# Altium PCB PCB1.PcbDoc (part 2 of 2)
Units mm, origin at the board's own origin, x right, y up, seen from the top; angles counter-clockwise.
Board outline 42.41 x 25.14 mm, 2 copper layers (Top Layer, Bottom Layer); 357 components, 11 nets, 765 pads, 0 vias.
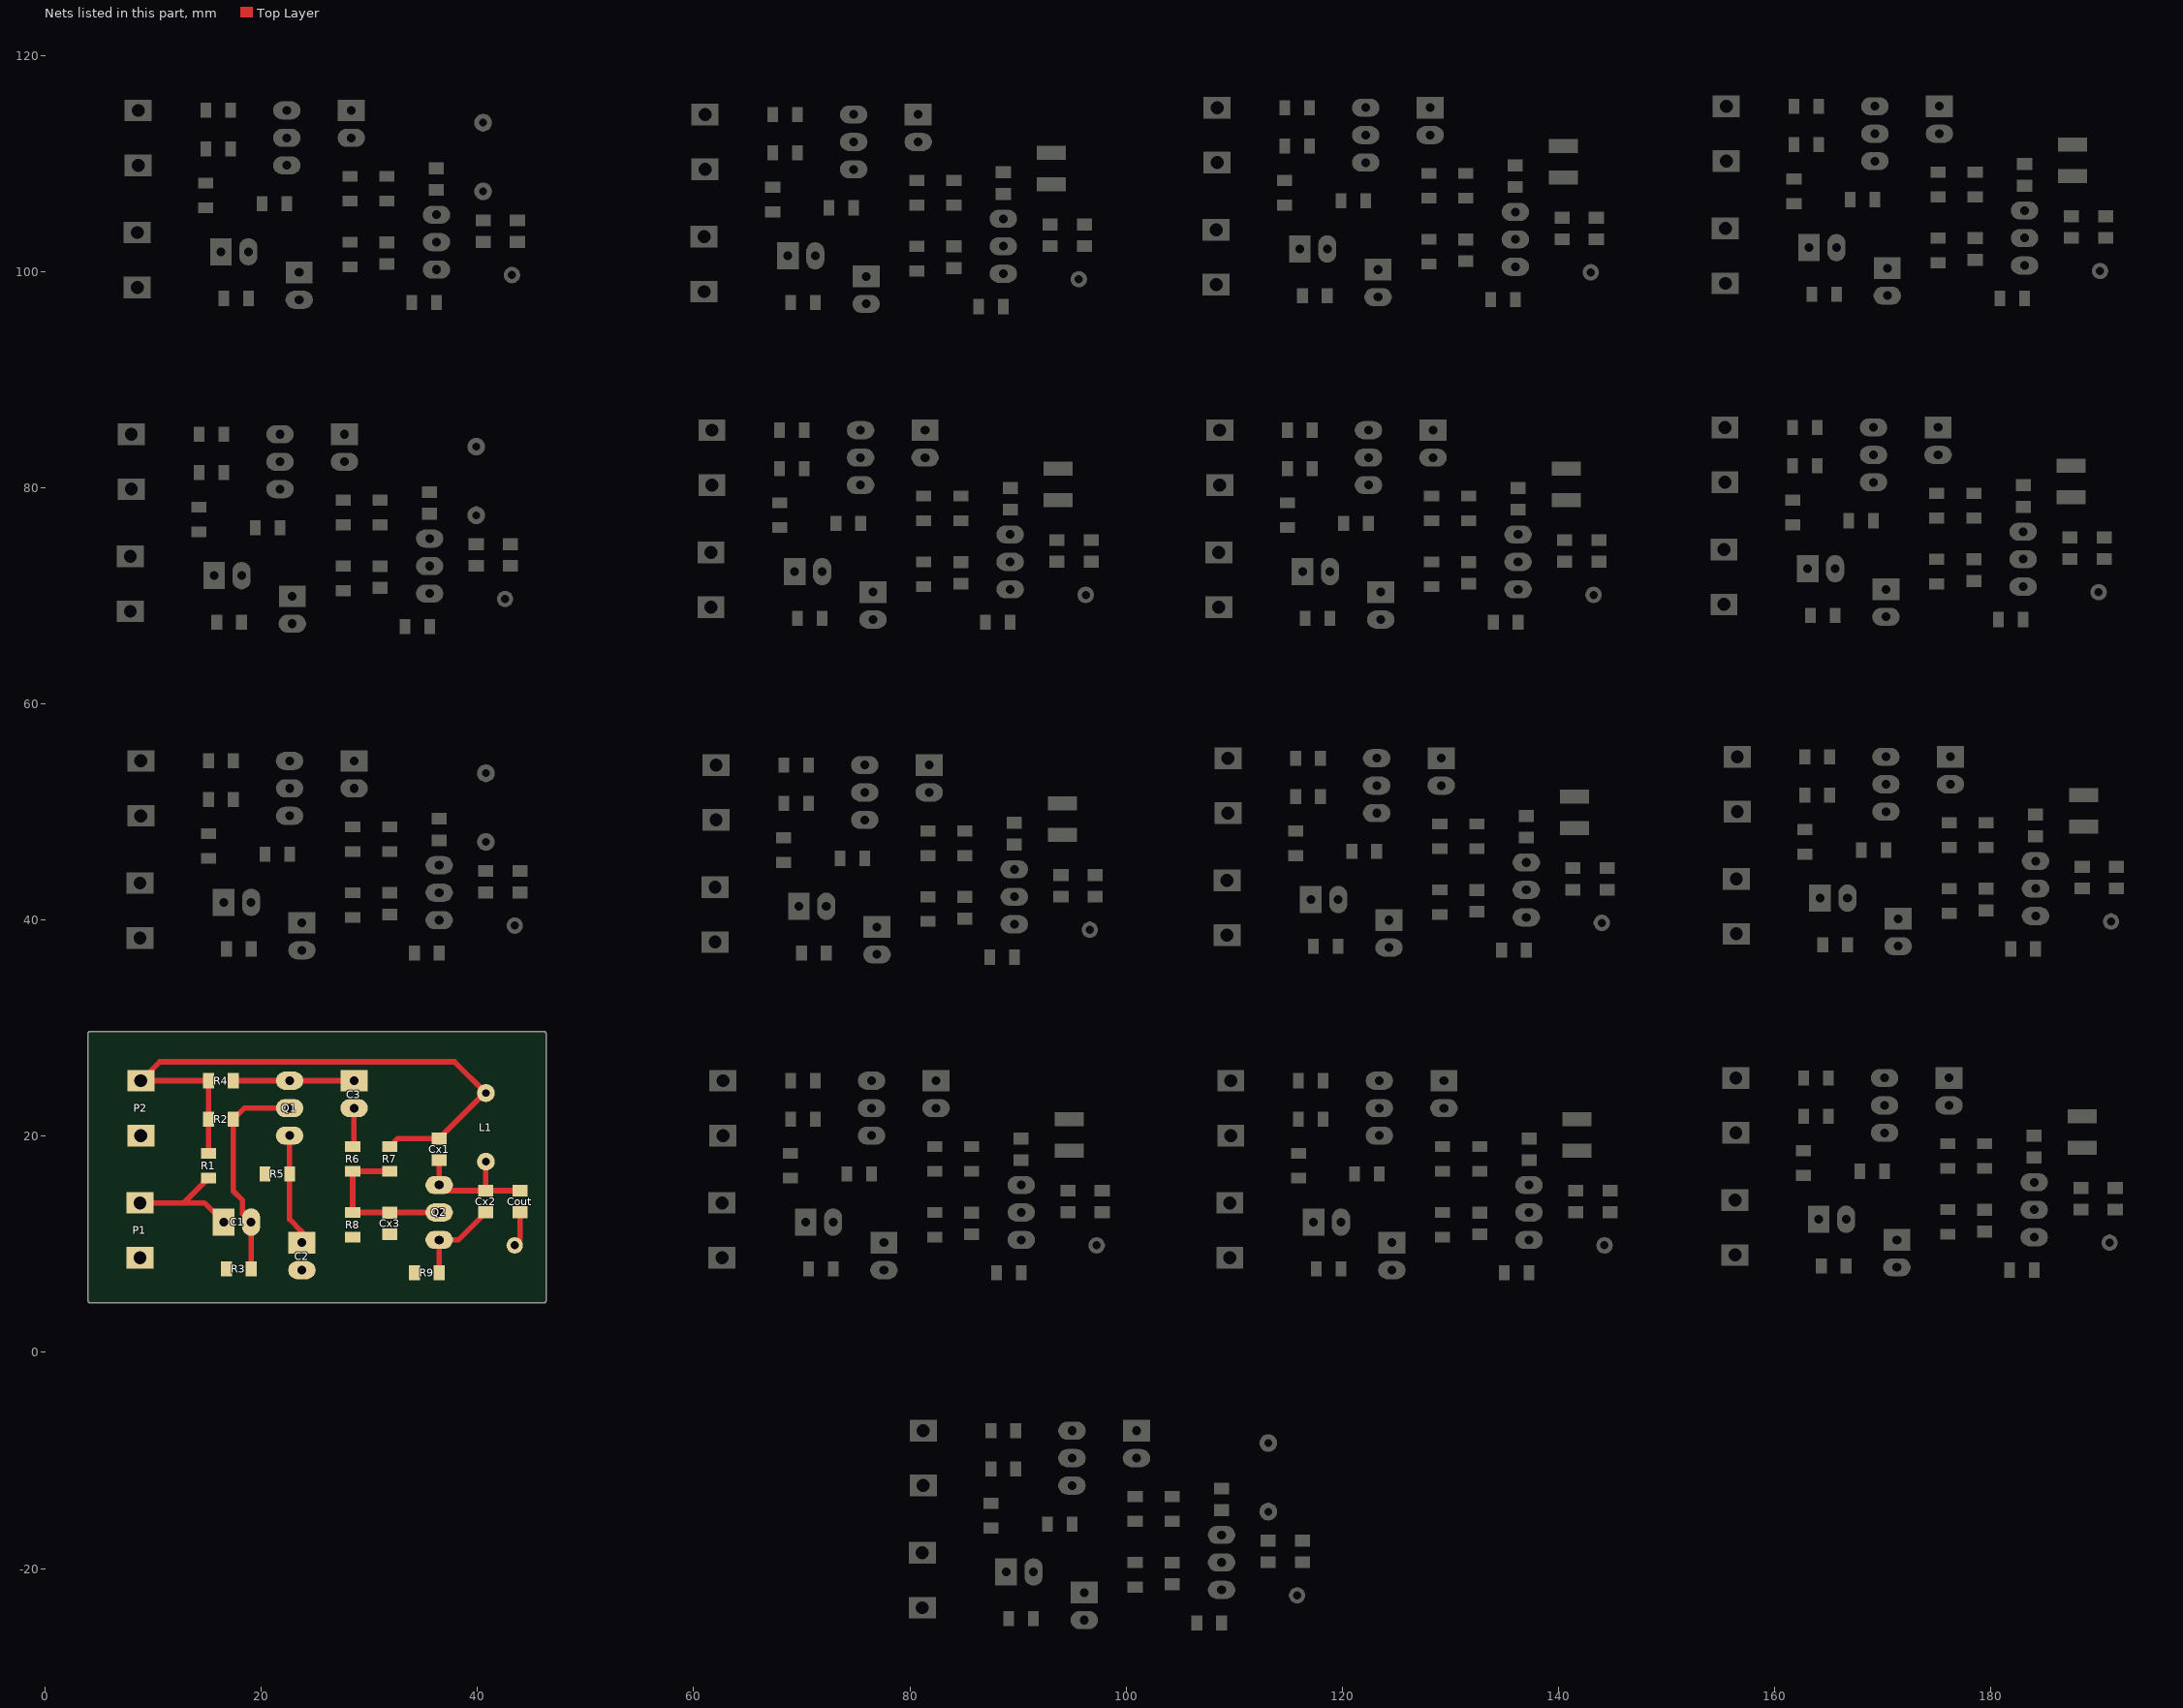
[diagram p2: the nets of this part, all layers, seen from the top]

## Part data
C1 C1_1 C1_1_1 C1_1_2 C1_2 C1_2_1 C1_2_2 C1_3 C1_3_1 C1_3_2 C1_4 C1_5 C1_5_1 C1_6 C1_6_1 C1_7 C1_7_1 C2 C2_1 C2_1_1 C2_1_2 C2_2 C2_2_1 C2_2_2 C2_3 C2_3_1 C2_3_2 C2_4 C2_5 C2_5_1 C2_6 C2_6_1 C2_7 C2_7_1 C3 C3_1 C3_1_1 C3_1_2 C3_2 C3_2_1 C3_2_2 C3_3 C3_3_1 C3_3_2 C3_4 C3_5 C3_5_1 C3_6 C3_6_1 C3_7 C3_7_1: library part CN-ALU-DIP, "Capacitor (Semiconductor SIM Model)"
Cout Cout_1 Cout_1_1 Cout_1_2 Cout_2 Cout_2_1 Cout_2_2 Cout_3 Cout_3_1 Cout_3_2 Cout_4 Cout_5 Cout_5_1 Cout_6 Cout_6_1 Cout_7 Cout_7_1 Cx1 Cx1_1 Cx1_1_1 Cx1_1_2 Cx1_2 Cx1_2_1 Cx1_2_2 Cx1_3 Cx1_3_1 Cx1_3_2 Cx1_4 Cx1_5 Cx1_5_1 Cx1_6 Cx1_6_1 Cx1_7 Cx1_7_1 Cx2 Cx2_1 Cx2_1_1 Cx2_1_2 Cx2_2 Cx2_2_1 Cx2_2_2 Cx2_3 Cx2_3_1 Cx2_3_2 Cx2_4 Cx2_5 Cx2_5_1 Cx2_6 Cx2_6_1 Cx2_7 Cx2_7_1 Cx3 Cx3_1 Cx3_1_1 Cx3_1_2 Cx3_2 Cx3_2_1 Cx3_2_2 Cx3_3 Cx3_3_1 Cx3_3_2 Cx3_4 Cx3_5 Cx3_5_1 Cx3_6 Cx3_6_1 Cx3_7 Cx3_7_1: library part CN
L1 L1_1 L1_2 L1_3 L1_4: library part L-DIP-1, "Inductor"
L_1 L_1_1 L_2 L_2_1 L_3 L_3_1 L_5 L_5_1 L_6 L_6_1 L_7 L_7_1 R1 R1_1 R1_1_1 R1_1_2 R1_2 R1_2_1 R1_2_2 R1_3 R1_3_1 R1_3_2 R1_4 R1_5 R1_5_1 R1_6 R1_6_1 R1_7 R1_7_1 R2 R2_1 R2_1_1 R2_1_2 R2_2 R2_2_1 R2_2_2 R2_3 R2_3_1 R2_3_2 R2_4 R2_5 R2_5_1 R2_6 R2_6_1 R2_7 R2_7_1 R3 R3_1 R3_1_1 R3_1_2 R3_2 R3_2_1 R3_2_2 R3_3 R3_3_1 R3_3_2 R3_4 R3_5 R3_5_1 R3_6 R3_6_1 R3_7 R3_7_1 R4 R4_1 R4_1_1 R4_1_2 R4_2 R4_2_1 R4_2_2 R4_3 R4_3_1 R4_3_2 R4_4 R4_5 R4_5_1 R4_6 R4_6_1 R4_7 R4_7_1 R5 R5_1 R5_1_1 R5_1_2 R5_2 R5_2_1 R5_2_2 R5_3 R5_3_1 R5_3_2 R5_4 R5_5 R5_5_1 R5_6 R5_6_1 R5_7 R5_7_1 R6 R6_1 R6_1_1 R6_1_2 R6_2 R6_2_1 R6_2_2 R6_3 R6_3_1 R6_3_2 R6_4 R6_5 R6_5_1 R6_6 R6_6_1 R6_7 R6_7_1 R7 R7_1 R7_1_1 R7_1_2 R7_2 R7_2_1 R7_2_2 R7_3 R7_3_1 R7_3_2 R7_4 R7_5 R7_5_1 R7_6 R7_6_1 R7_7 R7_7_1 R8 R8_1 R8_1_1 R8_1_2 R8_2 R8_2_1 R8_2_2 R8_3 R8_3_1 R8_3_2 R8_4 R8_5 R8_5_1 R8_6 R8_6_1 R8_7 R8_7_1 R9 R9_1 R9_1_1 R9_1_2 R9_2 R9_2_1 R9_2_2 R9_3 R9_3_1 R9_3_2 R9_4 R9_5 R9_5_1 R9_6 R9_6_1 R9_7 R9_7_1: library part Res-SMD, "Resistor"
P1 P1_1 P1_1_1 P1_1_2 P1_2 P1_2_1 P1_2_2 P1_3 P1_3_1 P1_3_2 P1_4 P1_5 P1_5_1 P1_6 P1_6_1 P1_7 P1_7_1 P2 P2_1 P2_1_1 P2_1_2 P2_2 P2_2_1 P2_2_2 P2_3 P2_3_1 P2_3_2 P2_4 P2_5 P2_5_1 P2_6 P2_6_1 P2_7 P2_7_1: "Domino, 2-Pin"
Q1 Q1_1 Q1_1_1 Q1_1_2 Q1_2 Q1_2_1 Q1_2_2 Q1_3 Q1_3_1 Q1_3_2 Q1_4 Q1_5 Q1_5_1 Q1_6 Q1_6_1 Q1_7 Q1_7_1 Q2 Q2_1 Q2_1_1 Q2_1_2 Q2_2 Q2_2_1 Q2_2_2 Q2_3 Q2_3_1 Q2_3_2 Q2_4 Q2_5 Q2_5_1 Q2_6 Q2_6_1 Q2_7 Q2_7_1: "NPN 600mW, ECB"

## Free pads (board coordinates)
  round 1.524 hole 0.762: 3(42.545,69.723) 3(43.18,99.695) 3(43.434,9.906) 3(43.434,39.497) 3(95.631,99.314) 3(96.266,70.104) 3(96.647,39.116) 3(97.282,9.906) 3(115.824,-22.479) 3(143.002,99.949) 3(143.256,70.104) 3(144.018,39.751) 3(144.272,9.906) 3(189.992,70.358) 3(190.119,100.076) 3(191.008,10.16) 3(191.135,39.878)

## Nets (pads, with @x,y where several pads share a name; then routed paths per layer and width w, separated by ;. In a path a pad name is that pad's centre, name@x,y a point inside that pad or via, vN(x,y) a via of type N, cw(c..) or ccw(c..) an arc to the next point about the centre after c; other vN are vias at no path point)
GND: C2.2 Cx3.1 P1.1 P2.1 R3.2 R5.2 R8.2 R9.2
NetC1_1: C1.1 P1.2 R1.2 | length 11.7
  Top Layer w0.5: P1.2@8.763,13.843 12.827,13.843 ; R1.2@15.113,16.129 12.827,13.843 ; C1.1@16.51,12.065 14.732,13.843 12.827,13.843
NetC1_2: C1.2 Q1.2 R2.2 R3.1 | length 20.2
  Top Layer w0.5: R3.1@19.05,7.747 C1.2@19.05,12.065 18.26,12.855 18.26,14.065 17.399,14.926 R2.2@17.399,21.59 18.415,22.606 Q1.2@22.606,22.606
NetC2_1: C2.1 Q1.1 R5.1 | length 10.4
  Top Layer w0.5: Q1.1@22.606,20.066 22.606,12.319 23.749,11.176 C2.1@23.749,10.16
NetC3_1: C3.1 Q1.3 R4.2 | length 11.2
  Top Layer w0.5: R4.2@17.399,25.146 Q1.3@22.606,25.146 C3.1@28.575,25.146
NetC3_2: C3.2 R6.1 | length 3.4
  Top Layer w0.5: R6.1@28.575,19.177 C3.2@28.575,22.606
NetCout_2: Cout.2 Cx1.1 Cx2.2 L1.2 Q2.3 | length 12.8
  Top Layer w0.5: Cx1.1@36.522,17.869 Cx1.1@36.449,17.796 Q2.3@36.449,15.494 36.973,14.97 Cx2.2@40.767,14.97 Cout.2@43.942,14.97 ; Cx2.2@40.767,14.97 L1.2@40.767,17.653
NetCx2_1: Cx2.1 Q2.1 R9.1 | length 8.4
  Top Layer w0.5: R9.1@36.449,7.366 Q2.1@36.449,10.414 38.211,10.414 Cx2.1@40.767,12.97
NetCx3_2: Cx3.2 Q2.2 R6.2 R7.2 R8.1 | length 15.2
  Top Layer w0.5: R7.2@31.877,16.764 R6.2@28.448,16.764 R8.1@28.448,12.954 Q2.2@36.449,12.954
OUT: Cout.1 pad.3@43.434,9.906 | length 3.3
  Top Layer w0.5: pad.3@43.434,9.906 43.942,10.414 Cout.1@43.942,12.97
VCC: Cx1.2 L1.1 P2.2 R1.1 R2.1 R4.1 R7.1 | length 57.7
  Top Layer w0.5: R1.1@15.113,18.415 R2.1@15.113,21.59 R4.1@15.113,25.146 P2.2@8.851,25.146 10.601,26.896 37.874,26.896 L1.1@40.767,24.003 ; R7.1@31.877,19.05 32.623,19.796 Cx1.2@36.449,19.796 L1.1@40.656,24.003
pads on no net: C1_1.1 C1_1.2 C1_1_1.1 C1_1_1.2 C1_1_2.1 C1_1_2.2 C1_2.1 C1_2.2 C1_2_1.1 C1_2_1.2 C1_2_2.1 C1_2_2.2 C1_3.1 C1_3.2 C1_3_1.1 C1_3_1.2 C1_3_2.1 C1_3_2.2 C1_4.1 C1_4.2 C1_5.1 C1_5.2 C1_5_1.1 C1_5_1.2 C1_6.1 C1_6.2 C1_6_1.1 C1_6_1.2 C1_7.1 C1_7.2 C1_7_1.1 C1_7_1.2 C2_1.1 C2_1.2 C2_1_1.1 C2_1_1.2 C2_1_2.1 C2_1_2.2 C2_2.1 C2_2.2 C2_2_1.1 C2_2_1.2 C2_2_2.1 C2_2_2.2 C2_3.1 C2_3.2 C2_3_1.1 C2_3_1.2 C2_3_2.1 C2_3_2.2 C2_4.1 C2_4.2 C2_5.1 C2_5.2 C2_5_1.1 C2_5_1.2 C2_6.1 C2_6.2 C2_6_1.1 C2_6_1.2 C2_7.1 C2_7.2 C2_7_1.1 C2_7_1.2 C3_1.1 C3_1.2 C3_1_1.1 C3_1_1.2 C3_1_2.1 C3_1_2.2 C3_2.1 C3_2.2 C3_2_1.1 C3_2_1.2 C3_2_2.1 C3_2_2.2 C3_3.1 C3_3.2 C3_3_1.1 C3_3_1.2 C3_3_2.1 C3_3_2.2 C3_4.1 C3_4.2 C3_5.1 C3_5.2 C3_5_1.1 C3_5_1.2 C3_6.1 C3_6.2 C3_6_1.1 C3_6_1.2 C3_7.1 C3_7.2 C3_7_1.1 C3_7_1.2 Cout_1.1 Cout_1.2 Cout_1_1.1 Cout_1_1.2 Cout_1_2.1 Cout_1_2.2 Cout_2.1 Cout_2.2 Cout_2_1.1 Cout_2_1.2 Cout_2_2.1 Cout_2_2.2 Cout_3.1 Cout_3.2 Cout_3_1.1 Cout_3_1.2 Cout_3_2.1 Cout_3_2.2 Cout_4.1 Cout_4.2 Cout_5.1 Cout_5.2 Cout_5_1.1 Cout_5_1.2 Cout_6.1 Cout_6.2 Cout_6_1.1 Cout_6_1.2 Cout_7.1 Cout_7.2 Cout_7_1.1 Cout_7_1.2 Cx1_1.1 Cx1_1.2 Cx1_1_1.1 Cx1_1_1.2 Cx1_1_2.1 Cx1_1_2.2 Cx1_2.1 Cx1_2.2 Cx1_2_1.1 Cx1_2_1.2 Cx1_2_2.1 Cx1_2_2.2 Cx1_3.1 Cx1_3.2 Cx1_3_1.1 Cx1_3_1.2 Cx1_3_2.1 Cx1_3_2.2 Cx1_4.1 Cx1_4.2 Cx1_5.1 Cx1_5.2 Cx1_5_1.1 Cx1_5_1.2 Cx1_6.1 Cx1_6.2 Cx1_6_1.1 Cx1_6_1.2 Cx1_7.1 Cx1_7.2 Cx1_7_1.1 Cx1_7_1.2 Cx2_1.1 Cx2_1.2 Cx2_1_1.1 Cx2_1_1.2 Cx2_1_2.1 Cx2_1_2.2 Cx2_2.1 Cx2_2.2 Cx2_2_1.1 Cx2_2_1.2 Cx2_2_2.1 Cx2_2_2.2 Cx2_3.1 Cx2_3.2 Cx2_3_1.1 Cx2_3_1.2 Cx2_3_2.1 Cx2_3_2.2 Cx2_4.1 Cx2_4.2 Cx2_5.1 Cx2_5.2 Cx2_5_1.1 Cx2_5_1.2 Cx2_6.1 Cx2_6.2 Cx2_6_1.1 Cx2_6_1.2 Cx2_7.1 Cx2_7.2 Cx2_7_1.1 Cx2_7_1.2 Cx3_1.1 Cx3_1.2 Cx3_1_1.1 Cx3_1_1.2 Cx3_1_2.1 Cx3_1_2.2 Cx3_2.1 Cx3_2.2 Cx3_2_1.1 Cx3_2_1.2 Cx3_2_2.1 Cx3_2_2.2 Cx3_3.1 Cx3_3.2 Cx3_3_1.1 Cx3_3_1.2 Cx3_3_2.1 Cx3_3_2.2 Cx3_4.1 Cx3_4.2 Cx3_5.1 Cx3_5.2 Cx3_5_1.1 Cx3_5_1.2 Cx3_6.1 Cx3_6.2 Cx3_6_1.1 Cx3_6_1.2 Cx3_7.1 Cx3_7.2 Cx3_7_1.1 Cx3_7_1.2 L1_1.1 L1_1.2 L1_2.1 L1_2.2 L1_3.1 L1_3.2 L1_4.1 L1_4.2 L_1.1 L_1.2 L_1_1.1 L_1_1.2 L_2.1 L_2.2 L_2_1.1 L_2_1.2 L_3.1 L_3.2 L_3_1.1 L_3_1.2 L_5.1 L_5.2 L_5_1.1 L_5_1.2 L_6.1 L_6.2 L_6_1.1 L_6_1.2 L_7.1 L_7.2 L_7_1.1 L_7_1.2 P1_1.1 P1_1.2 P1_1_1.1 P1_1_1.2 P1_1_2.1 P1_1_2.2 P1_2.1 P1_2.2 P1_2_1.1 P1_2_1.2 P1_2_2.1 P1_2_2.2 P1_3.1 P1_3.2 P1_3_1.1 P1_3_1.2 P1_3_2.1 P1_3_2.2 P1_4.1 P1_4.2 P1_5.1 P1_5.2 P1_5_1.1 P1_5_1.2 P1_6.1 P1_6.2 P1_6_1.1 P1_6_1.2 P1_7.1 P1_7.2 P1_7_1.1 P1_7_1.2 P2_1.1 P2_1.2 P2_1_1.1 P2_1_1.2 P2_1_2.1 P2_1_2.2 P2_2.1 P2_2.2 P2_2_1.1 P2_2_1.2 P2_2_2.1 P2_2_2.2 P2_3.1 P2_3.2 P2_3_1.1 P2_3_1.2 P2_3_2.1 P2_3_2.2 P2_4.1 P2_4.2 P2_5.1 P2_5.2 P2_5_1.1 P2_5_1.2 P2_6.1 P2_6.2 P2_6_1.1 P2_6_1.2 P2_7.1 P2_7.2 P2_7_1.1 P2_7_1.2 Q1_1.1 Q1_1.2 Q1_1.3 Q1_1_1.1 Q1_1_1.2 Q1_1_1.3 Q1_1_2.1 Q1_1_2.2 Q1_1_2.3 Q1_2.1 Q1_2.2 Q1_2.3 Q1_2_1.1 Q1_2_1.2 Q1_2_1.3 Q1_2_2.1 Q1_2_2.2 Q1_2_2.3 Q1_3.1 Q1_3.2 Q1_3.3 Q1_3_1.1 Q1_3_1.2 Q1_3_1.3 Q1_3_2.1 Q1_3_2.2 Q1_3_2.3 Q1_4.1 Q1_4.2 Q1_4.3 Q1_5.1 Q1_5.2 Q1_5.3 Q1_5_1.1 Q1_5_1.2 Q1_5_1.3 Q1_6.1 Q1_6.2 Q1_6.3 Q1_6_1.1 Q1_6_1.2 Q1_6_1.3 Q1_7.1 Q1_7.2 Q1_7.3 Q1_7_1.1 Q1_7_1.2 Q1_7_1.3 Q2_1.1 Q2_1.2 Q2_1.3 Q2_1_1.1 Q2_1_1.2 Q2_1_1.3 Q2_1_2.1 Q2_1_2.2 Q2_1_2.3 Q2_2.1 Q2_2.2 Q2_2.3 Q2_2_1.1 Q2_2_1.2 Q2_2_1.3 Q2_2_2.1 Q2_2_2.2 Q2_2_2.3 Q2_3.1 Q2_3.2 Q2_3.3 Q2_3_1.1 Q2_3_1.2 Q2_3_1.3 Q2_3_2.1 Q2_3_2.2 Q2_3_2.3 Q2_4.1 Q2_4.2 Q2_4.3 Q2_5.1 Q2_5.2 Q2_5.3 Q2_5_1.1 Q2_5_1.2 Q2_5_1.3 Q2_6.1 Q2_6.2 Q2_6.3 Q2_6_1.1 Q2_6_1.2 Q2_6_1.3 Q2_7.1 Q2_7.2 Q2_7.3 Q2_7_1.1 Q2_7_1.2 Q2_7_1.3 R1_1.1 R1_1.2 R1_1_1.1 R1_1_1.2 R1_1_2.1 R1_1_2.2 R1_2.1 R1_2.2 R1_2_1.1 R1_2_1.2 R1_2_2.1 R1_2_2.2 R1_3.1 R1_3.2 R1_3_1.1 R1_3_1.2 R1_3_2.1 R1_3_2.2 R1_4.1 R1_4.2 R1_5.1 R1_5.2 R1_5_1.1 R1_5_1.2 R1_6.1 R1_6.2 R1_6_1.1 R1_6_1.2 R1_7.1 R1_7.2 R1_7_1.1 R1_7_1.2 R2_1.1 R2_1.2 R2_1_1.1 R2_1_1.2 R2_1_2.1 R2_1_2.2 R2_2.1 R2_2.2 R2_2_1.1 R2_2_1.2 R2_2_2.1 R2_2_2.2 R2_3.1 R2_3.2 R2_3_1.1 R2_3_1.2 R2_3_2.1 R2_3_2.2 R2_4.1 R2_4.2 R2_5.1 R2_5.2 R2_5_1.1 R2_5_1.2 R2_6.1 R2_6.2 R2_6_1.1 R2_6_1.2 R2_7.1 R2_7.2 R2_7_1.1 R2_7_1.2 R3_1.1 R3_1.2 R3_1_1.1 R3_1_1.2 R3_1_2.1 R3_1_2.2 R3_2.1 R3_2.2 R3_2_1.1 R3_2_1.2 R3_2_2.1 R3_2_2.2 R3_3.1 R3_3.2 R3_3_1.1 R3_3_1.2 R3_3_2.1 R3_3_2.2 R3_4.1 R3_4.2 R3_5.1 R3_5.2 R3_5_1.1 R3_5_1.2 R3_6.1 R3_6.2 R3_6_1.1 R3_6_1.2 R3_7.1 R3_7.2 R3_7_1.1 R3_7_1.2 R4_1.1 R4_1.2 R4_1_1.1 R4_1_1.2 R4_1_2.1 R4_1_2.2 R4_2.1 R4_2.2 R4_2_1.1 R4_2_1.2 R4_2_2.1 R4_2_2.2 R4_3.1 R4_3.2 R4_3_1.1 R4_3_1.2 R4_3_2.1 R4_3_2.2 R4_4.1 R4_4.2 R4_5.1 R4_5.2 R4_5_1.1 R4_5_1.2 R4_6.1 R4_6.2 R4_6_1.1 R4_6_1.2 R4_7.1 R4_7.2 R4_7_1.1 R4_7_1.2 R5_1.1 R5_1.2 R5_1_1.1 R5_1_1.2 R5_1_2.1 R5_1_2.2 R5_2.1 R5_2.2 R5_2_1.1 R5_2_1.2 R5_2_2.1 R5_2_2.2 R5_3.1 R5_3.2 R5_3_1.1 R5_3_1.2 R5_3_2.1 R5_3_2.2 R5_4.1 R5_4.2 R5_5.1 R5_5.2 R5_5_1.1 R5_5_1.2 R5_6.1 R5_6.2 R5_6_1.1 R5_6_1.2 R5_7.1 R5_7.2 R5_7_1.1 R5_7_1.2 R6_1.1 R6_1.2 R6_1_1.1 R6_1_1.2 R6_1_2.1 R6_1_2.2 R6_2.1 R6_2.2 R6_2_1.1 R6_2_1.2 R6_2_2.1 R6_2_2.2 R6_3.1 R6_3.2 R6_3_1.1 R6_3_1.2 R6_3_2.1 R6_3_2.2 R6_4.1 R6_4.2 R6_5.1 R6_5.2 R6_5_1.1 R6_5_1.2 R6_6.1 R6_6.2 R6_6_1.1 R6_6_1.2 R6_7.1 R6_7.2 R6_7_1.1 R6_7_1.2 R7_1.1 R7_1.2 R7_1_1.1 R7_1_1.2 R7_1_2.1 R7_1_2.2 R7_2.1 R7_2.2 R7_2_1.1 R7_2_1.2 R7_2_2.1 R7_2_2.2 R7_3.1 R7_3.2 R7_3_1.1 R7_3_1.2 R7_3_2.1 R7_3_2.2 R7_4.1 R7_4.2 R7_5.1 R7_5.2 R7_5_1.1 R7_5_1.2 R7_6.1 R7_6.2 R7_6_1.1 R7_6_1.2 R7_7.1 R7_7.2 R7_7_1.1 R7_7_1.2 R8_1.1 R8_1.2 R8_1_1.1 R8_1_1.2 R8_1_2.1 R8_1_2.2 R8_2.1 R8_2.2 R8_2_1.1 R8_2_1.2 R8_2_2.1 R8_2_2.2 R8_3.1 R8_3.2 R8_3_1.1 R8_3_1.2 R8_3_2.1 R8_3_2.2 R8_4.1 R8_4.2 R8_5.1 R8_5.2 R8_5_1.1 R8_5_1.2 R8_6.1 R8_6.2 R8_6_1.1 R8_6_1.2 R8_7.1 R8_7.2 R8_7_1.1 R8_7_1.2 R9_1.1 R9_1.2 R9_1_1.1 R9_1_1.2 R9_1_2.1 R9_1_2.2 R9_2.1 R9_2.2 R9_2_1.1 R9_2_1.2 R9_2_2.1 R9_2_2.2 R9_3.1 R9_3.2 R9_3_1.1 R9_3_1.2 R9_3_2.1 R9_3_2.2 R9_4.1 R9_4.2 R9_5.1 R9_5.2 R9_5_1.1 R9_5_1.2 R9_6.1 R9_6.2 R9_6_1.1 R9_6_1.2 R9_7.1 R9_7.2 R9_7_1.1 R9_7_1.2
copper on no net: | length 4846.7
  Top Layer w0.5: 7.874,73.66 11.938,73.66 ; 8.509,103.632 12.573,103.632 ; 8.763,43.434 12.827,43.434 ; 14.224,75.946 11.938,73.66 ; 14.224,78.232 14.224,81.407 14.224,84.963 7.962,84.963 9.712,86.713 36.985,86.713 39.878,83.82 ; 14.859,105.918 12.573,103.632 ; 14.859,108.204 14.859,111.379 14.859,114.935 8.597,114.935 10.347,116.685 37.62,116.685 40.513,113.792 ; 15.113,45.72 12.827,43.434 ; 15.113,48.006 15.113,51.181 15.113,54.737 8.851,54.737 10.601,56.487 37.874,56.487 40.767,53.594 ; 15.621,71.882 13.843,73.66 11.938,73.66 ; 16.256,101.854 14.478,103.632 12.573,103.632 ; 16.51,41.656 14.732,43.434 12.827,43.434 ; 16.51,84.963 21.717,84.963 27.686,84.963 ; 17.145,114.935 22.352,114.935 28.321,114.935 ; 17.399,54.737 22.606,54.737 28.575,54.737 ; 18.161,67.564 18.161,71.882 17.371,72.672 17.371,73.882 16.51,74.743 16.51,81.407 17.526,82.423 21.717,82.423 ; 18.796,97.536 18.796,101.854 18.006,102.644 18.006,103.854 17.145,104.715 17.145,111.379 18.161,112.395 22.352,112.395 ; 19.05,37.338 19.05,41.656 18.26,42.446 18.26,43.656 17.399,44.517 17.399,51.181 18.415,52.197 22.606,52.197 ; 21.717,79.883 21.717,72.136 22.86,70.993 22.86,69.977 ; 22.352,109.855 22.352,102.108 23.495,100.965 23.495,99.949 ; 22.606,49.657 22.606,41.91 23.749,40.767 23.749,39.751 ; 27.686,78.994 27.686,82.423 ; 28.321,108.966 28.321,112.395 ; 28.575,48.768 28.575,52.197 ; 30.988,76.581 27.559,76.581 27.559,72.771 35.56,72.771 ; 30.988,78.867 31.734,79.613 35.56,79.613 39.767,83.82 ; 31.623,106.553 28.194,106.553 28.194,102.743 36.195,102.743 ; 31.623,108.839 32.369,109.585 36.195,109.585 40.402,113.792 ; 31.877,46.355 28.448,46.355 28.448,42.545 36.449,42.545 ; 31.877,48.641 32.623,49.387 36.449,49.387 40.656,53.594 ; 35.56,67.183 35.56,70.231 37.322,70.231 39.878,72.787 ; 35.633,77.686 35.56,77.613 35.56,75.311 36.084,74.787 39.878,74.787 43.053,74.787 ; 36.195,97.155 36.195,100.203 37.957,100.203 40.513,102.759 ; 36.268,107.658 36.195,107.585 36.195,105.283 36.719,104.759 40.513,104.759 43.688,104.759 ; 36.449,36.957 36.449,40.005 38.211,40.005 40.767,42.561 ; 36.522,47.46 36.449,47.387 36.449,45.085 36.973,44.561 40.767,44.561 43.942,44.561 ; 39.878,74.787 39.878,77.47 ; 40.513,104.759 40.513,107.442 ; 40.767,44.561 40.767,47.244 ; 42.545,69.723 43.053,70.231 43.053,72.787 ; 43.18,99.695 43.688,100.203 43.688,102.759 ; 43.434,39.497 43.942,40.005 43.942,42.561 ; 51.943,94.361 51.943,118.999 ; 52.197,65.024 52.197,89.662 ; 52.959,34.163 52.959,58.801 ; 53.213,4.826 53.213,29.464 ; 60.96,103.251 65.024,103.251 ; 61.595,74.041 65.659,74.041 ; 61.976,43.053 66.04,43.053 ; 62.611,13.843 66.675,13.843 ; 67.31,105.537 65.024,103.251 ; 67.31,107.823 67.31,110.998 67.31,114.554 61.048,114.554 62.798,116.304 87.785,116.304 93.091,110.998 90.44,110.998 88.646,109.204 84.82,109.204 84.074,108.458 ; 67.945,76.327 65.659,74.041 ; 67.945,78.613 67.945,81.788 67.945,85.344 61.683,85.344 63.433,87.094 88.42,87.094 93.726,81.788 91.075,81.788 89.281,79.994 85.455,79.994 84.709,79.248 ; 68.326,45.339 66.04,43.053 ; 68.326,47.625 68.326,50.8 68.326,54.356 62.064,54.356 63.814,56.106 88.801,56.106 94.107,50.8 91.456,50.8 89.662,49.006 85.836,49.006 85.09,48.26 ; 68.707,101.473 66.929,103.251 65.024,103.251 ; 68.961,16.129 66.675,13.843 ; 68.961,18.415 68.961,21.59 68.961,25.146 62.699,25.146 64.449,26.896 89.436,26.896 94.742,21.59 92.091,21.59 90.297,19.796 86.471,19.796 85.725,19.05 ; 69.342,72.263 67.564,74.041 65.659,74.041 ; 69.596,114.554 74.803,114.554 80.772,114.554 ; 69.723,41.275 67.945,43.053 66.04,43.053 ; 70.231,85.344 75.438,85.344 81.407,85.344 ; 70.358,12.065 68.58,13.843 66.675,13.843 ; 70.612,54.356 75.819,54.356 81.788,54.356 ; 71.247,25.146 76.454,25.146 82.423,25.146 ; 71.247,97.155 71.247,101.473 70.457,102.263 70.457,103.473 69.596,104.334 69.596,110.998 70.612,112.014 74.803,112.014 ; 71.882,67.945 71.882,72.263 71.092,73.053 71.092,74.263 70.231,75.124 70.231,81.788 71.247,82.804 75.438,82.804 ; 72.263,36.957 72.263,41.275 71.473,42.065 71.473,43.275 70.612,44.136 70.612,50.8 71.628,51.816 75.819,51.816 ; 72.898,7.747 72.898,12.065 72.108,12.855 72.108,14.065 71.247,14.926 71.247,21.59 72.263,22.606 76.454,22.606 ; 74.803,109.474 74.803,101.727 75.946,100.584 75.946,99.568 ; 75.438,80.264 75.438,72.517 76.581,71.374 76.581,70.358 ; 75.819,49.276 75.819,41.529 76.962,40.386 76.962,39.37 ; 76.454,20.066 76.454,12.319 77.597,11.176 77.597,10.16 ; 80.772,108.585 80.772,112.014 ; 81.153,-18.542 85.217,-18.542 ; 81.407,79.375 81.407,82.804 ; 81.788,48.387 81.788,51.816 ; 82.423,19.177 82.423,22.606 ; 84.074,106.172 80.645,106.172 80.645,102.362 88.646,102.362 ; 84.709,76.962 81.28,76.962 81.28,73.152 89.281,73.152 ; 85.09,45.974 81.661,45.974 81.661,42.164 89.662,42.164 ; 85.725,16.764 82.296,16.764 82.296,12.954 90.297,12.954 ; 87.503,-16.256 85.217,-18.542 ; 87.503,-13.97 87.503,-10.795 87.503,-7.239 81.241,-7.239 82.991,-5.489 110.264,-5.489 113.157,-8.382 ; 88.646,96.774 88.646,99.822 90.408,99.822 92.964,102.378 ; 88.719,107.277 88.646,107.204 88.646,104.902 89.17,104.378 92.964,104.378 ; 88.9,-20.32 87.122,-18.542 85.217,-18.542 ; 89.281,67.564 89.281,70.612 91.043,70.612 93.599,73.168 ; 89.354,78.067 89.281,77.994 89.281,75.692 89.805,75.168 93.599,75.168 ; 89.662,36.576 89.662,39.624 91.424,39.624 93.98,42.18 ; 89.735,47.079 89.662,47.006 89.662,44.704 90.186,44.18 93.98,44.18 ; 89.789,-7.239 94.996,-7.239 100.965,-7.239 ; 90.297,7.366 90.297,10.414 92.059,10.414 94.615,12.97 ; 90.37,17.869 90.297,17.796 90.297,15.494 90.821,14.97 94.615,14.97 ; 91.44,-24.638 91.44,-20.32 90.65,-19.53 90.65,-18.32 89.789,-17.459 89.789,-10.795 90.805,-9.779 94.996,-9.779 ; 93.091,108.098 92.964,107.971 92.964,104.378 ; 93.726,78.888 93.599,78.761 93.599,75.168 ; 94.107,47.9 93.98,47.773 93.98,44.18 ; 94.742,18.69 94.615,18.563 94.615,14.97 ; 94.996,-12.319 94.996,-20.066 96.139,-21.209 96.139,-22.225 ; 95.631,99.314 96.139,99.822 96.139,102.378 ; 96.139,104.378 92.964,104.378 ; 96.266,70.104 96.774,70.612 96.774,73.168 ; 96.647,39.116 97.155,39.624 97.155,42.18 ; 96.774,75.168 93.599,75.168 ; 97.155,44.18 93.98,44.18 ; 97.282,9.906 97.79,10.414 97.79,12.97 ; 97.79,14.97 94.615,14.97 ; 100.965,-13.208 100.965,-9.779 ; 104.267,-15.621 100.838,-15.621 100.838,-19.431 108.839,-19.431 ; 104.267,-13.335 105.013,-12.589 108.839,-12.589 113.046,-8.382 ; 108.331,103.886 112.395,103.886 ; 108.585,74.041 112.649,74.041 ; 108.839,-25.019 108.839,-21.971 110.601,-21.971 113.157,-19.415 ; 108.912,-14.516 108.839,-14.589 108.839,-16.891 109.363,-17.415 113.157,-17.415 116.332,-17.415 ; 109.347,43.688 113.411,43.688 ; 109.601,13.843 113.665,13.843 ; 113.157,-17.415 113.157,-14.732 ; 114.681,106.172 112.395,103.886 ; 114.681,108.458 114.681,111.633 114.681,115.189 108.419,115.189 110.169,116.939 135.156,116.939 140.462,111.633 137.811,111.633 136.017,109.839 132.191,109.839 131.445,109.093 ; 114.935,76.327 112.649,74.041 ; 114.935,78.613 114.935,81.788 114.935,85.344 108.673,85.344 110.423,87.094 135.41,87.094 140.716,81.788 138.065,81.788 136.271,79.994 132.445,79.994 131.699,79.248 ; 115.697,45.974 113.411,43.688 ; 115.697,48.26 115.697,51.435 115.697,54.991 109.435,54.991 111.185,56.741 136.172,56.741 141.478,51.435 138.827,51.435 137.033,49.641 133.207,49.641 132.461,48.895 ; 115.824,-22.479 116.332,-21.971 116.332,-19.415 ; 115.951,16.129 113.665,13.843 ; 115.951,18.415 115.951,21.59 115.951,25.146 109.689,25.146 111.439,26.896 136.426,26.896 141.732,21.59 139.081,21.59 137.287,19.796 133.461,19.796 132.715,19.05 ; 116.078,102.108 114.3,103.886 112.395,103.886 ; 116.332,72.263 114.554,74.041 112.649,74.041 ; 116.967,115.189 122.174,115.189 128.143,115.189 ; 117.094,41.91 115.316,43.688 113.411,43.688 ; 117.221,85.344 122.428,85.344 128.397,85.344 ; 117.348,12.065 115.57,13.843 113.665,13.843 ; 117.983,54.991 123.19,54.991 129.159,54.991 ; 118.237,25.146 123.444,25.146 129.413,25.146 ; 118.618,97.79 118.618,102.108 117.828,102.898 117.828,104.108 116.967,104.969 116.967,111.633 117.983,112.649 122.174,112.649 ; 118.872,67.945 118.872,72.263 118.082,73.053 118.082,74.263 117.221,75.124 117.221,81.788 118.237,82.804 122.428,82.804 ; 119.634,37.592 119.634,41.91 118.844,42.7 118.844,43.91 117.983,44.771 117.983,51.435 118.999,52.451 123.19,52.451 ; 119.888,7.747 119.888,12.065 119.098,12.855 119.098,14.065 118.237,14.926 118.237,21.59 119.253,22.606 123.444,22.606 ; 122.174,110.109 122.174,102.362 123.317,101.219 123.317,100.203 ; 122.428,80.264 122.428,72.517 123.571,71.374 123.571,70.358 ; 123.19,49.911 123.19,42.164 124.333,41.021 124.333,40.005 ; 123.444,20.066 123.444,12.319 124.587,11.176 124.587,10.16 ; 128.143,109.22 128.143,112.649 ; 128.397,79.375 128.397,82.804 ; 129.159,49.022 129.159,52.451 ; 129.413,19.177 129.413,22.606 ; 131.445,106.807 128.016,106.807 128.016,102.997 136.017,102.997 ; 131.699,76.962 128.27,76.962 128.27,73.152 136.271,73.152 ; 132.461,46.609 129.032,46.609 129.032,42.799 137.033,42.799 ; 132.715,16.764 129.286,16.764 129.286,12.954 137.287,12.954 ; 136.017,97.409 136.017,100.457 137.779,100.457 140.335,103.013 ; 136.09,107.912 136.017,107.839 136.017,105.537 136.541,105.013 140.335,105.013 ; 136.271,67.564 136.271,70.612 138.033,70.612 140.589,73.168 ; 136.344,78.067 136.271,77.994 136.271,75.692 136.795,75.168 140.589,75.168 ; 137.033,37.211 137.033,40.259 138.795,40.259 141.351,42.815 ; 137.106,47.714 137.033,47.641 137.033,45.339 137.557,44.815 141.351,44.815 ; 137.287,7.366 137.287,10.414 139.049,10.414 141.605,12.97 ; 137.36,17.869 137.287,17.796 137.287,15.494 137.811,14.97 141.605,14.97 ; 140.462,108.733 140.335,108.606 140.335,105.013 ; 140.716,78.888 140.589,78.761 140.589,75.168 ; 141.478,48.535 141.351,48.408 141.351,44.815 ; 141.732,18.69 141.605,18.563 141.605,14.97 ; 143.002,99.949 143.51,100.457 143.51,103.013 ; 143.256,70.104 143.764,70.612 143.764,73.168 ; 143.51,105.013 140.335,105.013 ; 143.764,75.168 140.589,75.168 ; 144.018,39.751 144.526,40.259 144.526,42.815 ; 144.272,9.906 144.78,10.414 144.78,12.97 ; 144.526,44.815 141.351,44.815 ; 144.78,14.97 141.605,14.97 ; 155.321,74.295 159.385,74.295 ; 155.448,104.013 159.512,104.013 ; 156.337,14.097 160.401,14.097 ; 156.464,43.815 160.528,43.815 ; 161.671,76.581 159.385,74.295 ; 161.671,78.867 161.671,82.042 161.671,85.598 155.409,85.598 157.159,87.348 182.146,87.348 187.452,82.042 184.801,82.042 183.007,80.248 179.181,80.248 178.435,79.502 ; 161.798,106.299 159.512,104.013 ; 161.798,108.585 161.798,111.76 161.798,115.316 155.536,115.316 157.286,117.066 182.273,117.066 187.579,111.76 184.928,111.76 183.134,109.966 179.308,109.966 178.562,109.22 ; 162.687,16.383 160.401,14.097 ; 162.687,18.669 162.687,21.844 162.687,25.4 156.425,25.4 158.175,27.15 183.162,27.15 188.468,21.844 185.817,21.844 184.023,20.05 180.197,20.05 179.451,19.304 ; 162.814,46.101 160.528,43.815 ; 162.814,48.387 162.814,51.562 162.814,55.118 156.552,55.118 158.302,56.868 183.289,56.868 188.595,51.562 185.944,51.562 184.15,49.768 180.324,49.768 179.578,49.022 ; 163.068,72.517 161.29,74.295 159.385,74.295 ; 163.195,102.235 161.417,104.013 159.512,104.013 ; 163.957,85.598 169.164,85.598 175.133,85.598 ; 164.084,12.319 162.306,14.097 160.401,14.097 ; 164.084,115.316 169.291,115.316 175.26,115.316 ; 164.211,42.037 162.433,43.815 160.528,43.815 ; 164.973,25.4 170.18,25.4 176.149,25.4 ; 165.1,55.118 170.307,55.118 176.276,55.118 ; 165.608,68.199 165.608,72.517 164.818,73.307 164.818,74.517 163.957,75.378 163.957,82.042 164.973,83.058 169.164,83.058 ; 165.735,97.917 165.735,102.235 164.945,103.025 164.945,104.235 164.084,105.096 164.084,111.76 165.1,112.776 169.291,112.776 ; 166.624,8.001 166.624,12.319 165.834,13.109 165.834,14.319 164.973,15.18 164.973,21.844 165.989,22.86 170.18,22.86 ; 166.751,37.719 166.751,42.037 165.961,42.827 165.961,44.037 165.1,44.898 165.1,51.562 166.116,52.578 170.307,52.578 ; 169.164,80.518 169.164,72.771 170.307,71.628 170.307,70.612 ; 169.291,110.236 169.291,102.489 170.434,101.346 170.434,100.33 ; 170.18,20.32 170.18,12.573 171.323,11.43 171.323,10.414 ; 170.307,50.038 170.307,42.291 171.45,41.148 171.45,40.132 ; 175.133,79.629 175.133,83.058 ; 175.26,109.347 175.26,112.776 ; 176.149,19.431 176.149,22.86 ; 176.276,49.149 176.276,52.578 ; 178.435,77.216 175.006,77.216 175.006,73.406 183.007,73.406 ; 178.562,106.934 175.133,106.934 175.133,103.124 183.134,103.124 ; 179.451,17.018 176.022,17.018 176.022,13.208 184.023,13.208 ; 179.578,46.736 176.149,46.736 176.149,42.926 184.15,42.926 ; 183.007,67.818 183.007,70.866 184.769,70.866 187.325,73.422 ; 183.08,78.321 183.007,78.248 183.007,75.946 183.531,75.422 187.325,75.422 ; 183.134,97.536 183.134,100.584 184.896,100.584 187.452,103.14 ; 183.207,108.039 183.134,107.966 183.134,105.664 183.658,105.14 187.452,105.14 ; 184.023,7.62 184.023,10.668 185.785,10.668 188.341,13.224 ; 184.096,18.123 184.023,18.05 184.023,15.748 184.547,15.224 188.341,15.224 ; 184.15,37.338 184.15,40.386 185.912,40.386 188.468,42.942 ; 184.223,47.841 184.15,47.768 184.15,45.466 184.674,44.942 188.468,44.942 ; 187.452,79.142 187.325,79.015 187.325,75.422 ; 187.579,108.86 187.452,108.733 187.452,105.14 ; 188.468,18.944 188.341,18.817 188.341,15.224 ; 188.595,48.662 188.468,48.535 188.468,44.942 ; 189.992,70.358 190.5,70.866 190.5,73.422 ; 190.119,100.076 190.627,100.584 190.627,103.14 ; 190.5,75.422 187.325,75.422 ; 190.627,105.14 187.452,105.14 ; 191.008,10.16 191.516,10.668 191.516,13.224 ; 191.135,39.878 191.643,40.386 191.643,42.942 ; 191.516,15.224 188.341,15.224 ; 191.643,44.942 188.468,44.942 ; 3.302,64.643 45.212,64.643 45.212,89.281 3.302,89.281 3.302,64.643 ; 3.937,94.615 45.847,94.615 45.847,119.253 3.937,119.253 3.937,94.615 ; 4.191,4.826 4.191,29.464 46.101,29.464 46.101,4.826 4.191,4.826 ; 4.191,34.417 46.101,34.417 46.101,59.055 4.191,59.055 4.191,34.417 ; 56.388,94.234 98.298,94.234 98.298,118.872 56.388,118.872 56.388,94.234 ; 57.023,65.024 98.933,65.024 98.933,89.662 57.023,89.662 57.023,65.024 ; 57.404,34.036 99.314,34.036 99.314,58.674 57.404,58.674 57.404,34.036 ; 58.039,4.826 99.949,4.826 99.949,29.464 58.039,29.464 58.039,4.826 ; 76.581,-27.559 118.491,-27.559 118.491,-2.921 76.581,-2.921 76.581,-27.559 ; 103.759,94.869 145.669,94.869 145.669,119.507 103.759,119.507 103.759,94.869 ; 104.013,65.024 145.923,65.024 145.923,89.662 104.013,89.662 104.013,65.024 ; 104.775,34.671 146.685,34.671 146.685,59.309 104.775,59.309 104.775,34.671 ; 105.029,4.826 146.939,4.826 146.939,29.464 105.029,29.464 105.029,4.826 ; 150.749,65.278 192.659,65.278 192.659,89.916 150.749,89.916 150.749,65.278 ; 150.876,94.996 192.786,94.996 192.786,119.634 150.876,119.634 150.876,94.996 ; 151.765,5.08 193.675,5.08 193.675,29.718 151.765,29.718 151.765,5.08 ; 151.892,34.798 193.802,34.798 193.802,59.436 151.892,59.436 151.892,34.798

## Polygon pours and split planes (outlines as drawn)
no net on Top Layer "Top Layer-No Net" (solid, pour order 36): 56.388,118.872 98.298,118.872 98.298,94.234 56.388,94.234
no net on Top Layer "Top Layer-No Net" (solid, pour order 34): 103.759,119.507 145.669,119.507 145.669,94.869 103.759,94.869
no net on Top Layer "Top Layer-No Net" (solid, pour order 32): 150.876,119.634 192.786,119.634 192.786,94.996 150.876,94.996
no net on Top Layer "Top Layer-No Net" (solid, pour order 30): 57.404,58.674 99.314,58.674 99.314,34.036 57.404,34.036
no net on Top Layer "Top Layer-No Net" (solid, pour order 28): 104.775,59.309 146.685,59.309 146.685,34.671 104.775,34.671
no net on Top Layer "Top Layer-No Net" (solid, pour order 26): 151.892,59.436 193.802,59.436 193.802,34.798 151.892,34.798

## Other copper
Top Layer:
  drawing of 23 lines, arcs and shapes, not listed